# Altium PCB juncrionPCBTSAV.PcbDoc
Units mm, origin at the board's own origin, x right, y up, seen from the top; angles counter-clockwise.
Board outline 125 x 95 mm, 2 copper layers (Top Layer, Bottom Layer), stack 1.569 mm thick; 16 components, 19 nets, 56 pads, 70 vias.
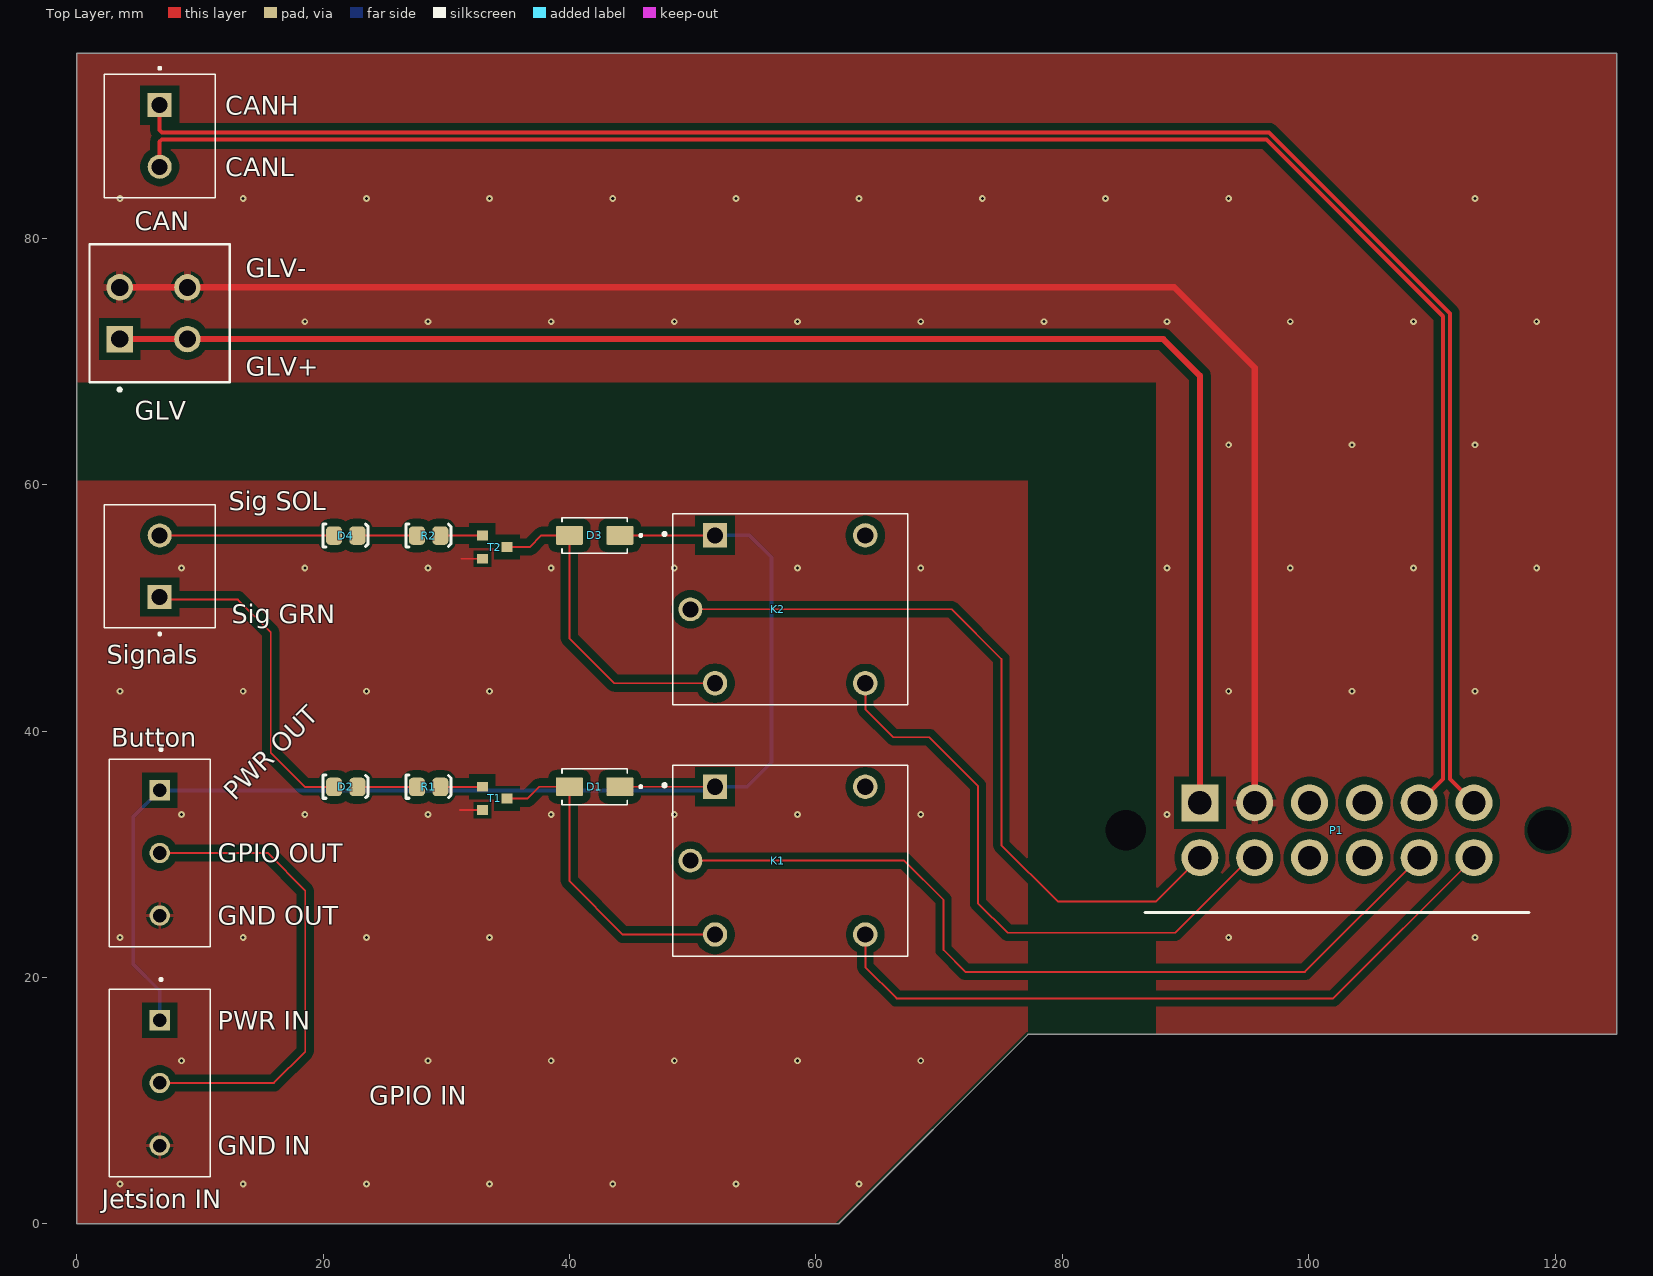
[diagram p0: Top Layer view]
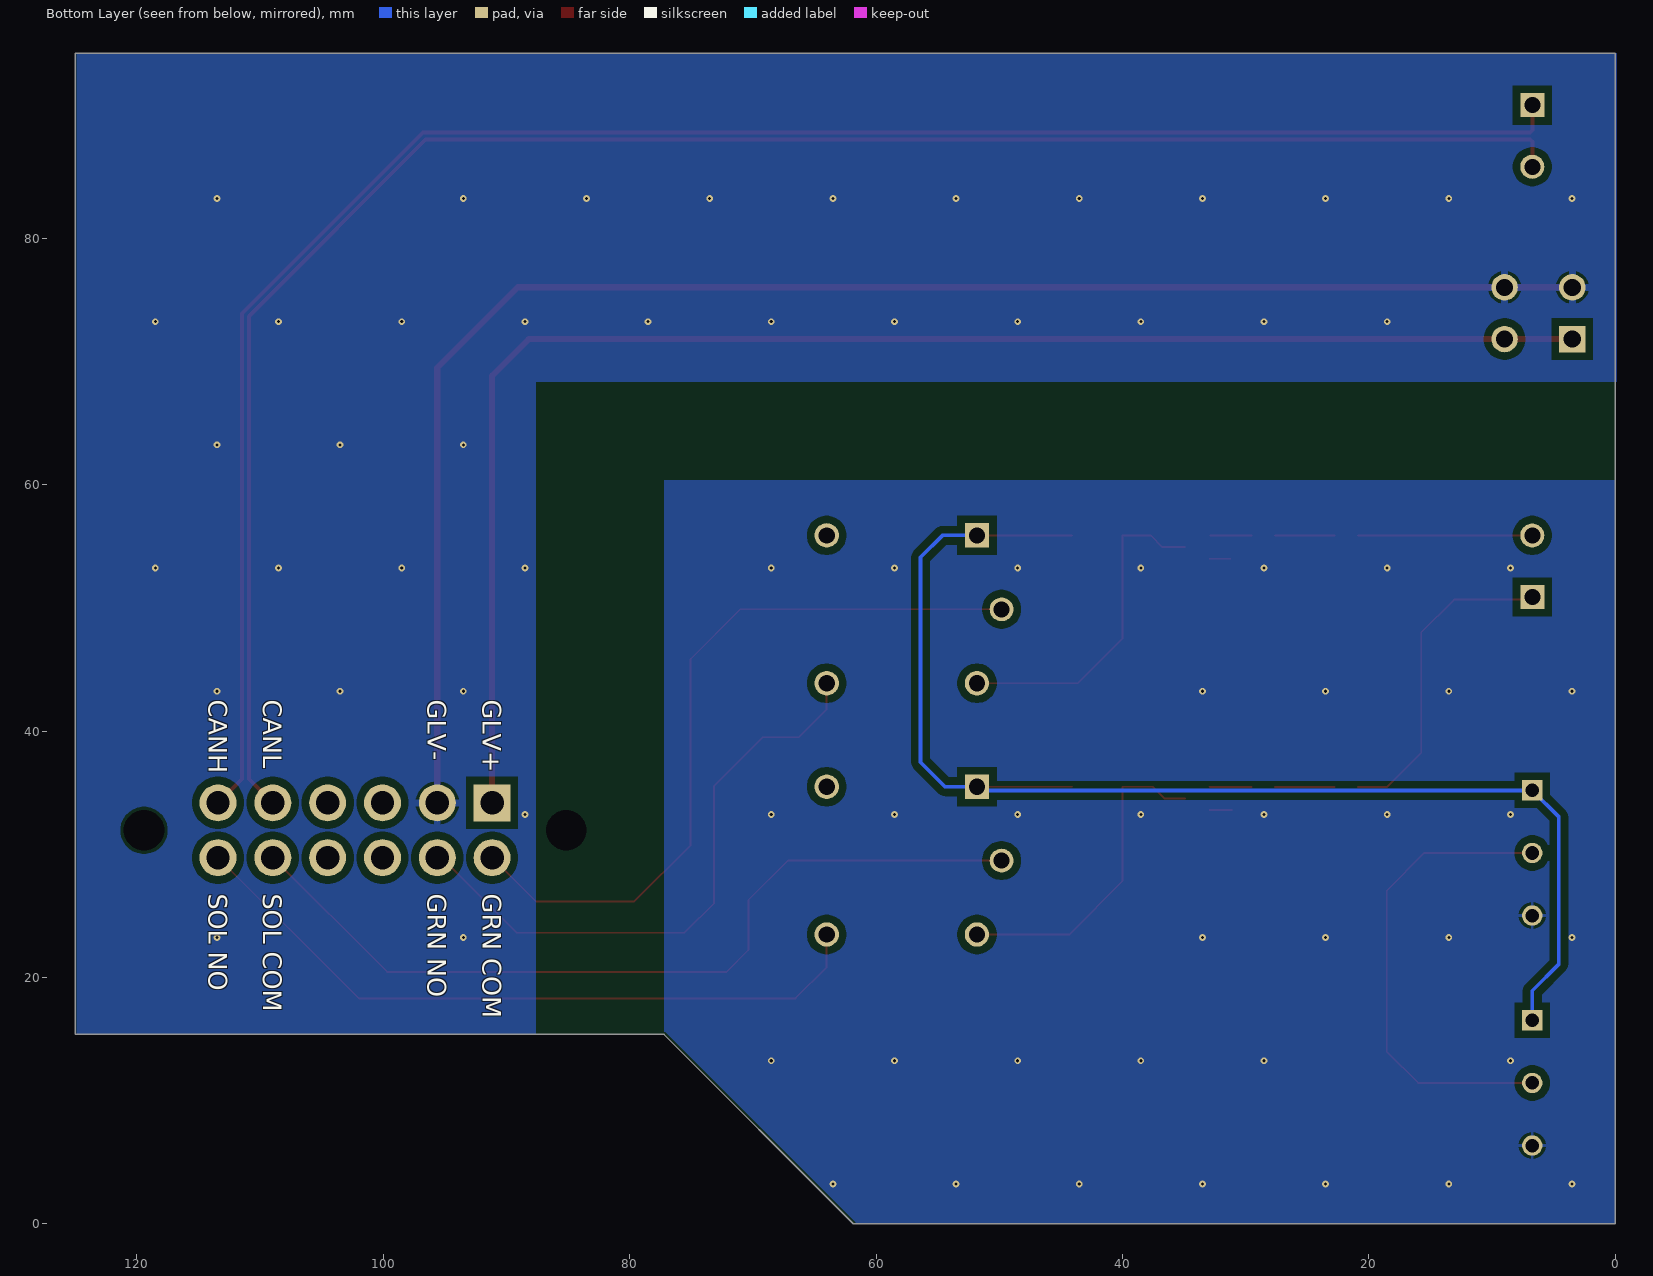
[diagram p1: Bottom Layer view, seen from below]
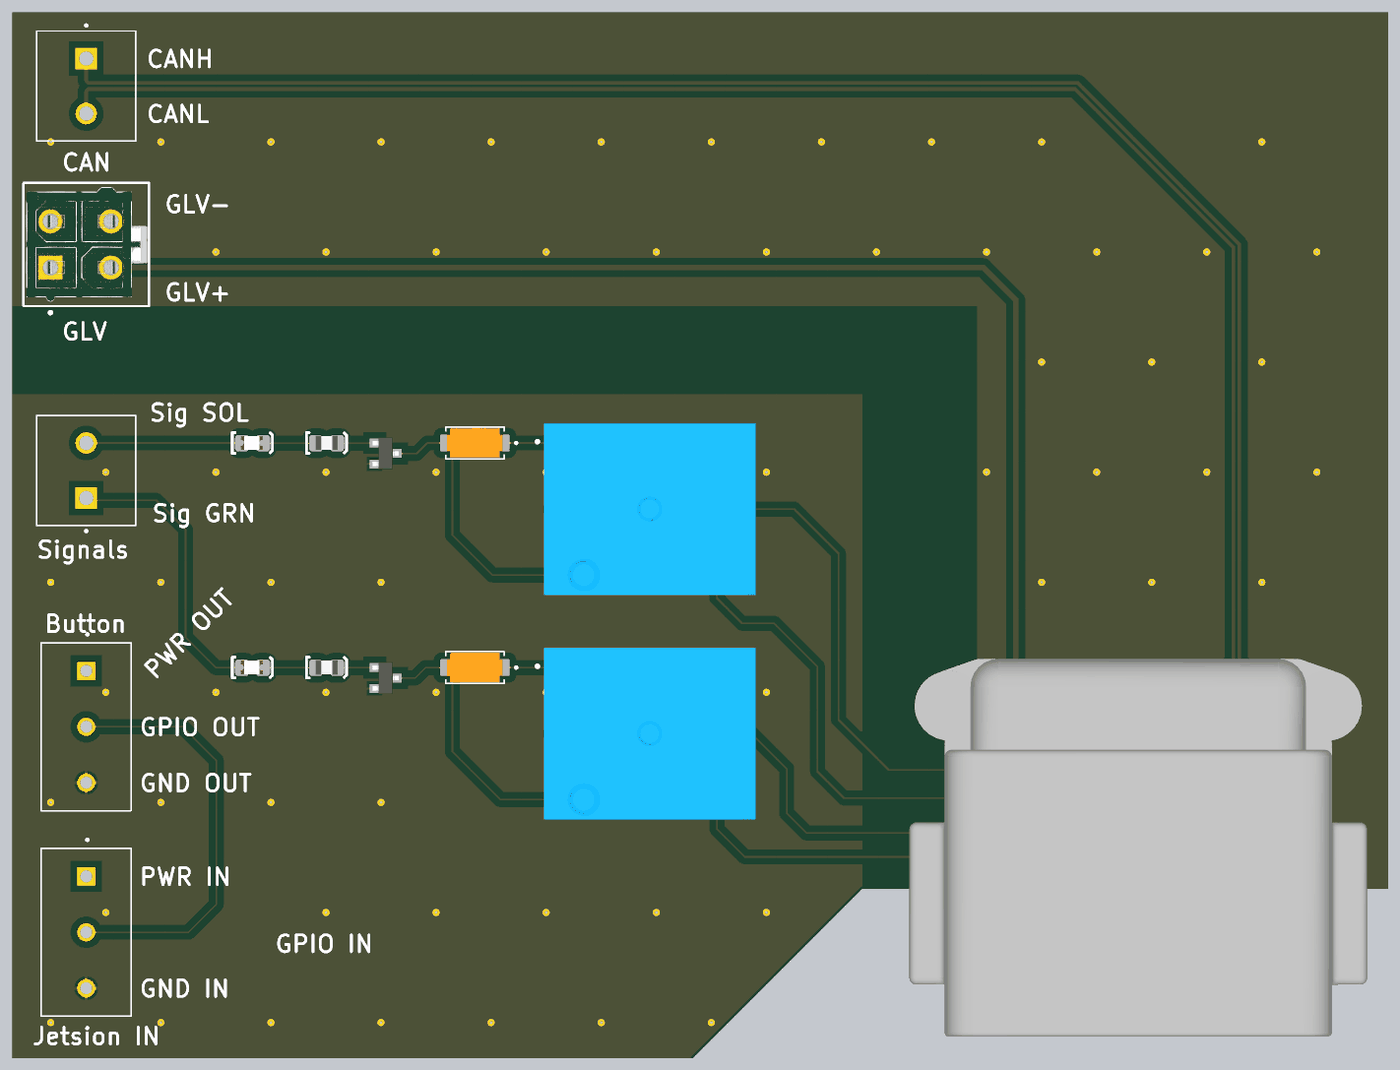
[diagram p2: 3D render of the assembled board from above, using the file's embedded part models]

## Layer stack, top to bottom
Top Solder: solder mask 0.0254, SM-001, Dk 4
Top Layer: signal copper 0.035
Dielectric 1: core 1.4986, Core-043, Dk 4.3
Bottom Layer: signal copper 0.035
Bottom Solder: solder mask 0.0254, SM-001, Dk 4

## Board outline
0,0 0,95 125,95 125,15.367 77.216,15.367 61.849,0

## Design rules (kind name [scope] priority, off if disabled: settings)
Clearance [All] p1: gap=0.254 ignorepadtopadclearanceinfootprint=FALSE except(0: Arc-Hole Track-Hole SMDPad-Hole THPad-Hole Via-Hole Fill-Hole Region-Hole Text-Hole; 0.1: THPad-THPad; 0.152: Arc-SMDPad Track-SMDPad SMDPad-SMDPad; 0.2: Arc-THPad Track-THPad SMDPad-THPad THPad-Via; 0.203: Arc-Arc Arc-Track Arc-Region Track-Track Track-Region SMDPad-Region THPad-Region Via-Region Fill-Region Poly-Region Region-Region; 0.6: Arc-Poly Track-Poly SMDPad-Poly THPad-Poly Via-Poly Fill-Poly Poly-Poly)
DiffPairsRouting [All] p1: maxlimit=0.22 minlimit=0.22 mostfreqgap=0.22 toplayer_minwidth=0.33 toplayer_maxwidth=0.33 toplayer_prefwidth=0.33 bottomlayer_minwidth=0.33 bottomlayer_maxwidth=0.33 bottomlayer_prefwidth=0.33 maxuncoupledlength=12.7
Height [All] p1: minheight=0 maxheight=50 prefheight=12.7
HoleSize [All] p1: absolutevalues=TRUE maxlimit=10 minlimit=0.025 maxpercent=80.000 minpercent=20.000
MinimumSolderMaskSliver [All] p1 off: minsoldermaskwidth=0.254
NetAntennae [All] p1 off: netantennaetolerance=0
PlaneClearance [All] p1: clearance=0.4
PlaneConnect [All] p1: pad.planeconnectstyle=Relief pad.reliefexpansion=0.508 pad.reliefentries=4 pad.reliefconductorwidth=0.8 pad.reliefairgap=0.254 via.planeconnectstyle=Direct via.reliefexpansion=0.508 via.reliefentries=4 via.reliefconductorwidth=0.8 via.reliefairgap=0.254
PolygonConnect [All] p1: thpad.connectstyle=Relief thpad.reliefconductorwidth=0.6 thpad.reliefentries=4 thpad.polygonreliefangle="90 Angle" thpad.airgapwidth=0.254 smdpad.connectstyle=Relief smdpad.reliefconductorwidth=0.6 smdpad.reliefentries=4 smdpad.polygonreliefangle="90 Angle" smdpad.airgapwidth=0.254 via.connectstyle=Direct via.reliefconductorwidth=0.6 via.reliefentries=4 via.polygonreliefangle="90 Angle" via.airgapwidth=0.254
RoutingVias [All] p1: holewidth=0.25 width=0.55 viastyle="Through Hole" minholewidth=0.203 minwidth=0.254 maxholewidth=0.711 maxwidth=1.27
SilkToSilkClearance [All] p1 off: silktosilkclearance=0.254
SilkToSolderMaskClearance [IsPad] p1 off: minsilkscreentomaskgap=0.254 clearancetoexposedcopper=TRUE
SolderMaskExpansion [All] p1: expansion=0.051 istentingtop=FALSE
SupplyNets "Schematic Supply Nets_1" [InNet('GND')] p1: voltage=0.000
SupplyNets "Schematic Supply Nets" [InNet('5V')] p2: voltage=0.000
Width [All] p1: maxlimit=3 minlimit=0.127 preferedwidth=0.152 minimp=50.000000 maximp=50.000000 favimp=50.000000
21 further rules are at their usual default settings.

## Classes and differential pairs
differential pair CAN: +CAN_P -CAN_N

## Components (designator, comment, footprint, x,y, rotation, side; value= is the part's Value field where it differs from the comment)
CAN "CAN" PHOENIX_1935776 2.231,93.305 r270 top (schematic designator J1)
D1 "M7" DIOM505270X240 42.037,35.48 r180 top
D2 "Red" "0805 LED" 21.844,35.491 r0 top
D3 "M7" DIOM505270X240 42.037,55.88 r180 top
D4 "Red" "0805 LED" 21.844,55.891 r0 top
GLV "Power to Jetsion" FP-39288040-MFG 6.731,73.914 r90 top (schematic designator J2)
"Jetsion IN" "From Jetsion" TE_282837-3 6.731,11.43 r270 top (schematic designator J3)
K1 "SRD-05VDC-SL-C" RELAY_SRD-05VDC-SL-C 57.912,29.48 r0 top
K2 "SRD-05VDC-SL-C" RELAY_SRD-05VDC-SL-C 57.912,49.88 r0 top
P1 "DTF13-12P" DTF13-12P 102.285,29.718 r0 top
R1 "150R" 0805 28.575,35.491 r0 top
R2 "150R" 0805 28.575,55.891 r0 top
Signals "Signals" PHOENIX_1935776 11.231,48.38 r90 top (schematic designator J4)
T1 "NPN" PCBComponent_1 32.475,35.88 r270 top
T2 "NPN" PCBComponent_1 32.475,56.28 r270 top
? "To Button" TE_282837-3 6.731,30.099 r270 top

## Footprints (in the part's own frame and the unit in brackets; to place one, negate y for a bottom-side part, rotate by r counter-clockwise, add the part's x,y. Pads: shape width x height; smd on the part's side, far side on the other; paste and mask are expansions set on the pad)
0805 [mm]
  rrect50% 1.3x1.5 smd: 1(-0.962,-0.026) 2(0.938,-0.026)
  silkscreen extent -1.85,-0.95 1.8,0.93, body extent -1,-0.65 1,0.66, height 0.73
"0805 LED" [mm]
  rrect50% 1.3x1.5 smd: A(-0.962,-0.026) K(0.938,-0.026)
  silkscreen extent -1.85,-0.95 1.8,0.93, body extent -1.09,-0.63 0.91,0.62, height 1
DIOM505270X240 [mm]
  rrect15% 2.21x1.53 smd: A(2.05,0) C(-2.05,0)
  silkscreen extent -3.85,-1.45 2.65,1.45, body extent -2.52,-1.35 2.53,1.35, height 2.37
DTF13-12P [mm]
  round 3 hole 3.3 unplated: 0(-17.145,2.22) 0(17.145,2.22)
  rect 3x3 hole 1.9: 1(-11.114,4.45)
  round 3 hole 1.9: 2(-6.664,4.45) 3(-2.214,4.45) 4(2.236,4.45) 5(6.686,4.45) 6(11.136,4.45) 7(11.136,0) 8(6.686,0) 9(2.236,0) 10(-2.214,0) 11(-6.664,0) 12(-11.114,0)
  silkscreen extent -15.56,-4.45 15.59,-4.45, body extent -20.79,-27.74 20.79,6.55, height 23.13
FP-39288040-MFG [mm]
  rect 2.15x2.15 hole 1.4 paste-2539.97 mask+0: 1(-2.1,3.25)
  round 2.15 hole 1.4 paste-2539.97 mask+0: 2(2.1,3.25) 3(-2.1,-2.25) 4(2.1,-2.25)
  silkscreen extent -6.32,-5.7 5.6,5.7, body extent -5.7,-5.8 5.7,5.8, height 0.25
PCBComponent_1 [mm]
  rect 0.8x0.9 smd: B(0.4,0.45) C(1.35,2.45) E(2.3,0.45)
  body extent -0.1,0.25 2.8,2.65, height 1.15
PHOENIX_1935776 [mm]
  rect 1.95x1.95 / inner round 1.95 / far side rect 1.95x1.95 hole 1.3: 1(2.5,4.5)
  round 1.95 hole 1.3: 2(7.5,4.5)
  silkscreen extent -0.6,0 10,9
RELAY_SRD-05VDC-SL-C [mm]
  rect 1.98x1.98 / inner round 1.98 / far side rect 1.98x1.98 hole 1.32: A1(-6.1,6)
  round 1.98 hole 1.32: A2(-6.1,-6) NC(6.1,6) NO(6.1,-6)
  round 1.935 hole 1.29: COM(-8.1,0)
  silkscreen extent -10.3,-7.75 9.55,7.75, body extent -9.6,-7.8 9.6,7.8, height 15.8
TE_282837-3 [mm]
  rect 1.65x1.65 hole 1.1: 1(-5.08,0)
  round 1.65 hole 1.1: 2(0,0) 3(5.08,0)
  silkscreen extent -8.5,-4.1 7.62,4.1

## Part data
CAN Signals: library part 1935776, Package=None, Availability=Unavailable, MP=1935776, Price=None
D1 D3: "Diode, SMA, 1000V, 1A, 150°C", Package="DO-214AC Diotec", Check_prices=https://www.snapeda.com/parts/M7/Diotec/view-part/?ref=eda, MF="Diotec Semiconductor", MP=M7, SnapEDA_Link=https://www.snapeda.com/parts/M7/Diotec/view-part/?ref=snap
D2 D4: library part SML-210LTT86, "Red LED Indication - Discrete 1.75V 0805 (2012 Metric)", Digikey Part Number=511-1286-1-ND, Manufacturer="ROHM Semiconductor", Colour=Red, Part Number=SML-210LTT86
GLV: library part CMP-04776-000078-1, "CONN HEADER VERT 4POS 4.2MM", Current Rating=9A, Manufacturer=Molex, Manufacturer Part Number=39288040, Package=0, Temperature="-40°C to +105°C", Temperature Range High=+105°C, Temperature Range Low=-40°C, Voltage Rating=600V, Automotive=No, Category=Conn, ComponentLink2Description=Datasheet, ComponentLink2URL=https://www.molex.com/webdocs/datasheets/pdf/en-us/0039288040_PCB_HEADERS.pdf, Conn Gender=Male, Conn Orientation=Vertical, Contact Material=Tin,Nickel, Device Class L1=Connectors, Device Class L2="Headers and Wire Housings", Device Class L3=unset, Digikey Description="CONN HEADER VERT 4POS 4.2MM", Footprint Url=https://www.molex.com/pdm_docs/sd/039288040_sd.pdf, Height=13.1mm, Lead Free=Yes, Mouser Description="Conn Power HDR 4 POS 4.2mm Solder ST Thru-Hole 4 Terminal 1 Port Mini-Fit Jrá??Bag", Number of Contacts=4, Number Of Rows=2, Octopart=https://octopart.com/39-28-8040-molex-25241, Pitch=4.2mm, RoHS=TRUE
"Jetsion IN" ?: library part 282837-3, "TERMI-BLOK PCB MOUNT 3P", Package=None, Availability=Unavailable, MP=282837-3, Price=None
K1 K2: "5V Trigger Relay Module For Arduino And Raspberry Pi 5V Trigger Relay Module For Arduino And Raspberry Pi", Package="NON STANDARD-5 Songle Relay", Availability="Not in stock", Check_prices=https://www.snapeda.com/parts/SRD-05VDC-SL-C/Songle+Relay/view-part/?ref=eda, MF="Songle Relay", MP=SRD-05VDC-SL-C, Price=None, SnapEDA_Link=https://www.snapeda.com/parts/SRD-05VDC-SL-C/Songle+Relay/view-part/?ref=snap
P1: Digikey Part Number=1734-1861-ND, Angle=90, Contact="Copper Alloy", Digikey Link=https://www.digikey.com/products/en?keywords=dtf13-12pa, Flange=No, Part Number=DTF13-12P, Pitch=4.45mm, Positions=12, Row Spacing=4.45mm
R1 R2: library part RC0805FR07150RL, Digikey Part Number=311-150CRCT-ND, Manufacturer=YAGEO, Rated Power=0.125W, Tolerance=0.01, Material=FR-07, Part Number=RC0805FR07150RL

## Via types
v1: diameter 0.55, hole 0.25, Top Layer to Bottom Layer, 70 vias

## Nets (pads, with @x,y where several pads share a name; then routed paths per layer and width w, separated by ;. In a path a pad name is that pad's centre, name@x,y a point inside that pad or via, vN(x,y) a via of type N, cw(c..) or ccw(c..) an arc to the next point about the centre after c; other vN are vias at no path point)
5V: "Jetsion IN.1" ?.1 D1.C D3.C K1.A1 K2.A1 | length 108.5
  Top Layer w0.152: D1.C K1.A1 ; D3.C K2.A1
  Bottom Layer w0.3: 6.731,16.51 6.731,18.923 4.572,21.082 4.572,33.02 ?.1 51.511,35.179 K1.A1 54.403,35.48 56.388,37.465 56.388,54.102 54.61,55.88 K2.A1
CAN_N: CAN.2 P1.5 | length 152.6
  Top Layer w0.33: CAN.2 6.731,87.837 6.924,88.03 96.562,88.03 110.921,73.671 110.921,36.118 P1.5
CAN_P: CAN.1 P1.6 | length 153.5
  Top Layer w0.33: CAN.1 6.731,88.773 6.924,88.58 96.789,88.58 111.471,73.898 111.471,36.118 P1.6
GLV+: GLV.1 GLV.3 P1.1 | length 123.6
  Top Layer w0.508: GLV.1 88.206,71.814 91.171,68.849 P1.1
GLV-: GLV.2 GLV.4 P1.2 | length 130.2
  Top Layer w0.508: GLV.2 89.086,76.014 95.621,69.479 P1.2
  other v1: 93.508,23.231 113.508,23.231 88.508,33.231 93.508,43.231 103.508,43.231 113.508,43.231 88.508,53.231 98.508,53.231 108.508,53.231 118.508,53.231 93.508,63.231 103.508,63.231 113.508,63.231 18.508,73.231 28.508,73.231 38.508,73.231 48.508,73.231 58.508,73.231 68.508,73.231 78.508,73.231 88.508,73.231 98.508,73.231 108.508,73.231 118.508,73.231 3.508,83.231 13.508,83.231 23.508,83.231 33.508,83.231 43.508,83.231 53.508,83.231 63.508,83.231 73.508,83.231 83.508,83.231 93.508,83.231 113.508,83.231
GND: "Jetsion IN.3" ?.3 T1.E T2.E | length 3.5
  Top Layer w0.152: 31.115,33.58 T1.E ; 31.242,53.98 T2.E
  other v1: 3.508,3.231 13.508,3.231 23.508,3.231 33.508,3.231 43.508,3.231 53.508,3.231 63.508,3.231 8.508,13.231 28.508,13.231 38.508,13.231 48.508,13.231 58.508,13.231 68.508,13.231 3.508,23.231 13.508,23.231 23.508,23.231 33.508,23.231 8.508,33.231 18.508,33.231 28.508,33.231 38.508,33.231 48.508,33.231 58.508,33.231 68.508,33.231 3.508,43.231 13.508,43.231 23.508,43.231 33.508,43.231 8.508,53.231 18.508,53.231 28.508,53.231 38.508,53.231 48.508,53.231 58.508,53.231 68.508,53.231
Net_2: "Jetsion IN.2" ?.2 | length 39
  Top Layer w0.152: 6.731,11.43 16.002,11.43 18.542,13.97 18.542,27.051 15.494,30.099 ?.2
NetD1_A: D1.A K1.A2 T1.C | length 26.7
  Top Layer w0.152: T1.C 36.603,34.53 37.553,35.48 D1.A 39.987,27.831 44.338,23.48 K1.A2
NetD2_A: D2.A Signals.1 | length 26.3
  Top Layer w0.152: Signals.1 6.938,50.673 13.081,50.673 15.748,48.006 15.748,38.227 18.511,35.464 D2.A
  Top Layer w0.254: Signals.1@6.461,50.054 Signals.1@6.477,50.038
NetD2_K: D2.K R1.1 | length 4.8
  Top Layer w0.152: D2.K R1.1
NetD3_A: D3.A K2.A2 T2.C | length 27.2
  Top Layer w0.152: T2.C 36.769,54.93 37.719,55.88 D3.A 39.987,47.516 43.623,43.88 K2.A2
NetD4_A: D4.A Signals.2 | length 14.2
  Top Layer w0.152: Signals.2 20.866,55.88 D4.A
NetD4_K: D4.K R2.1 | length 4.8
  Top Layer w0.152: D4.K R2.1
NetK1_COM: K1.COM P1.8 | length 69.1
  Top Layer w0.152: K1.COM 67.167,29.48 70.358,26.289 70.358,22.225 72.136,20.447 99.7,20.447 P1.8
NetK1_NO: K1.NO P1.7 | length 57.8
  Top Layer w0.152: K1.NO 64.012,20.824 66.548,18.288 101.991,18.288 P1.7
NetK2_COM: K2.COM P1.12 | length 61.5
  Top Layer w0.152: K2.COM 71.024,49.88 75.057,45.847 75.057,30.734 79.629,26.162 87.615,26.162 P1.12
NetK2_NO: K2.NO P1.11 | length 49.3
  Top Layer w0.152: K2.NO 64.012,41.779 66.294,39.497 69.215,39.497 73.152,35.56 73.152,26.035 75.561,23.626 89.154,23.626 95.246,29.718 P1.11
NetR1_2: R1.2 T1.B | length 3.4
  Top Layer w0.152: R1.2 32.909,35.464 T1.B
NetR2_2: R2.2 T2.B | length 3.3
  Top Layer w0.152: R2.2 T2.B@32.847,55.864
pads on no net: K1.NC K2.NC P1.0 P1.3 P1.4 P1.9 P1.10

## Polygon pours and split planes (outlines as drawn)
GND on Top Layer "GND_L01_P005" (solid, remove dead copper, pour order 5): 0,0 61.62,0 cw(c61.849,0) 61.687,0.162 77.054,15.529 cw(c77.216,15.367) 77.216,15.596 77.216,60.325 0,60.325
GLV- on Top Layer "GLV-_L01_P006" (solid, remove dead copper, pour order 6): 87.63,15.367 125,15.367 125,94.996 0,94.996 0,68.326 87.63,68.326
GND on Bottom Layer "GND_L02_P007" (solid, pour order 7): 0,0.013 61.621,0.013 cw(c61.849,0) 61.687,0.162 77.054,15.529 cw(c77.216,15.367) 77.216,15.596 77.216,60.338 0,60.338
GLV- on Bottom Layer "GLV-_L02_P008" (solid, pour order 8): 87.63,15.367 124.884,15.367 124.884,95.009 -0.116,95.009 -0.116,68.339 87.63,68.339

## Silkscreen, mask and mechanical layers (free items; w line width, h text height)
Top Overlay:
  text "CANH" at 12.065,90.043 h1.52
  text "CANL" at 12.065,85.043 h1.52
  text "GLV-" at 13.716,76.835 h1.52
  text "GLV+" at 13.716,68.834 h1.52
  text "Sig SOL" at 12.319,57.912 h1.52
  text "Sig GRN" at 12.573,48.768 h1.52
  text "Button" at 2.794,38.735 h1.52
  text "PWR OUT" at 12.827,34.268 h1.52 r45
  text "GPIO OUT" at 11.43,29.337 h1.52
  text "GND OUT" at 11.43,24.257 h1.52
  text "PWR IN" at 11.43,15.748 h1.52
  text "GPIO IN" at 23.749,9.652 h1.52
  text "GND IN" at 11.43,5.588 h1.52
Bottom Overlay:
  text "GLV+" at 91.933,42.546 h1.52 r90
  text "GLV-" at 96.383,42.546 h1.52 r90
  text "CANL" at 109.733,42.546 h1.52 r90
  text "CANH" at 114.183,42.546 h1.52 r90
  text "GRN COM" at 91.933,26.797 h1.52 r90
  text "GRN NO" at 96.383,26.797 h1.52 r90
  text "SOL COM" at 109.733,26.797 h1.52 r90
  text "SOL NO" at 114.183,26.797 h1.52 r90
Mechanical 1:
  lines w0.254: 124.968,15.367 77.216,15.367 61.849,0 0,0 0,95 125,95 125,15.367
Drill Drawing:
  circle w0.254: c-18.78,133.625 r0.847
  lines w0.254: -19.627,106.955 -18.78,106.108 -17.933,106.955 -18.78,107.802 -19.627,106.955 ; -19.627,109.918 -18.78,110.342 -17.933,109.918 -18.357,110.765 -17.933,111.612 -18.78,111.188 -19.627,111.612 -19.203,110.765 -19.627,109.918 ; -19.627,113.728 -17.933,113.728 -17.933,115.422 -19.627,115.422 -19.627,113.728 ; -19.627,117.538 -19.627,117.962 -19.203,118.385 -19.627,118.808 -19.627,119.232 -19.203,119.232 -18.78,118.808 -18.357,119.232 -17.933,119.232 -17.933,118.808 -18.357,118.385 -17.933,117.962 -17.933,117.538 -18.357,117.538 -18.78,117.962 -19.203,117.538 -19.627,117.538 ; -19.627,121.772 -19.203,121.772 -19.203,121.349 -18.357,121.349 -18.357,121.772 -17.933,121.772 -17.933,122.618 -18.357,122.618 -18.357,123.042 -19.203,123.042 -19.203,122.618 -19.627,122.618 -19.627,121.772 ; -19.627,126.852 -17.933,126.852 -18.78,125.158 -19.627,126.852 ; -19.627,129.392 -19.203,129.392 -18.78,128.969 -18.357,129.392 -17.933,129.392 -18.357,129.815 -17.933,130.238 -18.357,130.238 -18.78,130.662 -19.203,130.238 -19.627,130.238 -19.203,129.815 -19.627,129.392
  lines w0.381: -21.145,104.965 247.614,104.965 ; -21.145,135.445 247.614,135.445 ; -7.153,101.155 -7.153,139.255 ; 7.829,101.155 7.829,139.255 ; 37.03,101.155 37.03,139.255 ; 49.879,101.155 49.879,139.255 ; 68.518,101.155 68.518,139.255 ; 106.607,101.155 106.607,139.255 ; 121.589,101.155 121.589,139.255 ; 140.532,101.155 140.532,139.255 ; 157.038,101.155 157.038,139.255 ; 178.723,101.155 178.723,139.255 ; 212.597,101.155 212.597,139.255 ; -21.145,101.155 247.614,101.155 247.614,139.255 -21.145,139.255 -21.145,101.155
  text "Symbol" at -18.86,136.588 h1.83
  text "Count" at -6.01,136.588 h1.83
  text "Hole Size" at 8.972,136.588 h1.83
  text "Plated" at 38.173,136.588 h1.83
  text "Hole Type" at 51.022,136.588 h1.83
  text "Drill Layer Pair" at 69.661,136.588 h1.83
  text "Via/Pad" at 107.75,136.588 h1.83
  text "Pad Shape" at 122.732,136.588 h1.83
  text "Template" at 141.675,136.588 h1.83
  text "Description" at 158.181,136.588 h1.83
  text "Hole Tolerance (+)" at 179.866,136.588 h1.83
  text "Hole Tolerance (-)" at 213.74,136.588 h1.83
  text "2" at -6.01,132.779 h1.52
  text "1.290mm (50.79mil)" at 8.972,132.779 h1.52
  text "PTH" at 38.173,132.779 h1.52
  text "Round" at 51.022,132.779 h1.52
  text "Top Layer - Bottom Layer" at 69.661,132.779 h1.52
  text "Pad" at 107.75,132.779 h1.52
  text "Rounded" at 122.732,132.779 h1.52
  text "c194h129" at 141.675,132.779 h1.52
  text "2" at -6.01,128.969 h1.52
  text "3.300mm (129.92mil)" at 8.972,128.969 h1.52
  text "NPTH" at 38.173,128.969 h1.52
  text "Round" at 51.022,128.969 h1.52
  text "Top Layer - Bottom Layer" at 69.661,128.969 h1.52
  text "Pad" at 107.75,128.969 h1.52
  text "Rounded" at 122.732,128.969 h1.52
  text "c300hn330" at 141.675,128.969 h1.52
  text "4" at -6.01,125.158 h1.52
  text "1.300mm (51.18mil)" at 8.972,125.158 h1.52
  text "PTH" at 38.173,125.158 h1.52
  text "Round" at 51.022,125.158 h1.52
  text "Top Layer - Bottom Layer" at 69.661,125.158 h1.52
  text "Pad" at 107.75,125.158 h1.52
  text "Rounded" at 122.732,125.158 h1.52
  text "(Mixed)" at 141.675,125.158 h1.52
  text "4" at -6.01,121.349 h1.52
  text "1.400mm (55.12mil)" at 8.972,121.349 h1.52
  text "PTH" at 38.173,121.349 h1.52
  text "Round" at 51.022,121.349 h1.52
  text "Top Layer - Bottom Layer" at 69.661,121.349 h1.52
  text "Pad" at 107.75,121.349 h1.52
  text "(Mixed)" at 122.732,121.349 h1.52
  text "(Mixed)" at 141.675,121.349 h1.52
  text "6" at -6.01,117.538 h1.52
  text "1.100mm (43.31mil)" at 8.972,117.538 h1.52
  text "PTH" at 38.173,117.538 h1.52
  text "Round" at 51.022,117.538 h1.52
  text "Top Layer - Bottom Layer" at 69.661,117.538 h1.52
  text "Pad" at 107.75,117.538 h1.52
  text "(Mixed)" at 122.732,117.538 h1.52
  text "(Mixed)" at 141.675,117.538 h1.52
  text "8" at -6.01,113.728 h1.52
  text "1.320mm (51.97mil)" at 8.972,113.728 h1.52
  text "PTH" at 38.173,113.728 h1.52
  text "Round" at 51.022,113.728 h1.52
  text "Top Layer - Bottom Layer" at 69.661,113.728 h1.52
  text "Pad" at 107.75,113.728 h1.52
  text "Rounded" at 122.732,113.728 h1.52
  text "(Mixed)" at 141.675,113.728 h1.52
  text "12" at -6.01,109.918 h1.52
  text "1.900mm (74.80mil)" at 8.972,109.918 h1.52
  text "PTH" at 38.173,109.918 h1.52
  text "Round" at 51.022,109.918 h1.52
  text "Top Layer - Bottom Layer" at 69.661,109.918 h1.52
  text "Pad" at 107.75,109.918 h1.52
  text "(Mixed)" at 122.732,109.918 h1.52
  text "(Mixed)" at 141.675,109.918 h1.52
  text "70" at -6.01,106.108 h1.52
  text "0.250mm (9.84mil)" at 8.972,106.108 h1.52
  text "PTH" at 38.173,106.108 h1.52
  text "Round" at 51.022,106.108 h1.52
  text "Top Layer - Bottom Layer" at 69.661,106.108 h1.52
  text "Via" at 107.75,106.108 h1.52
  text "Rounded" at 122.732,106.108 h1.52
  text "v55h25" at 141.675,106.108 h1.52
  text "108 Total" at -6.01,102.298 h1.52
  text "FABRICATION NOTES" at 133.02,88.501 h3
  text "1. QUANTITY: 5" at 133.02,83.405 h3
  text "2. SIZE: 125mm x 95mm" at 133.02,78.308 h3
  text "3. LAYERS: 2" at 133.02,73.212 h3
  text "4. COPPER WEIGHT: 2oz" at 133.02,69.115 h3
  text "5. SOLDER MASK: Blue" at 133.245,64.255 h3
  text "6. SILKSCREEN: White" at 133.245,59.158 h3
  text "7. SURFACE FINISH: ENIG" at 133.245,54.062 h3
  text "8. TOTAL THICKNESS: 1.6mm" at 132.735,49.104 h3
  text "9. VIAS: TENTED" at 133.035,44.179 h3